# Altium PCB LS1-LS2.PcbDoc
Units mil, origin at the board's own origin, x right, y up, seen from the top; angles counter-clockwise.
Board outline 3550 x 3000 mil, 4 copper layers (Top Layer, Internal Plane 1, Internal Plane 2, Bottom Layer), stack 30.634 mil thick; 66 components, 57 nets, 305 pads, 88 vias.
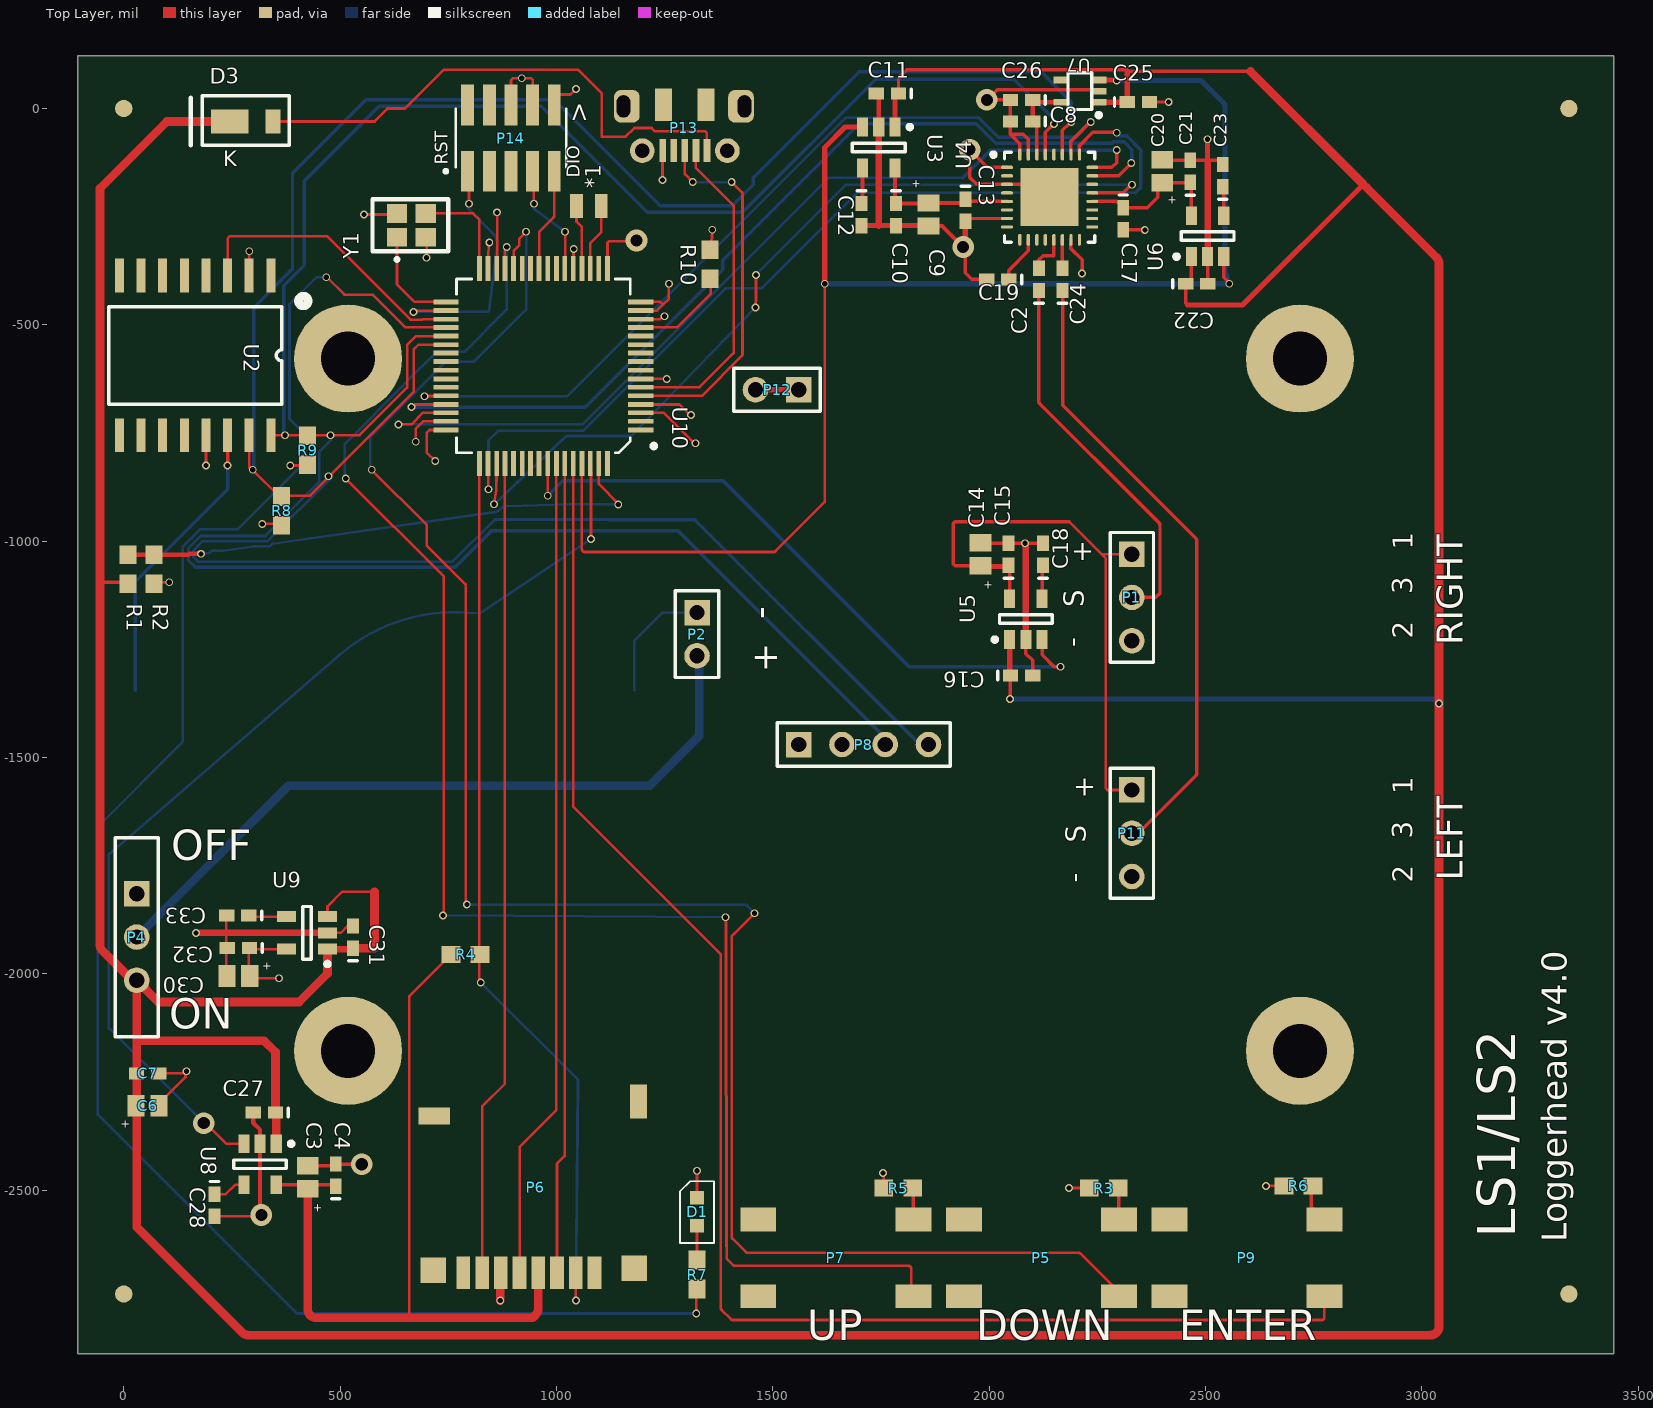
[diagram p0: Top Layer view]
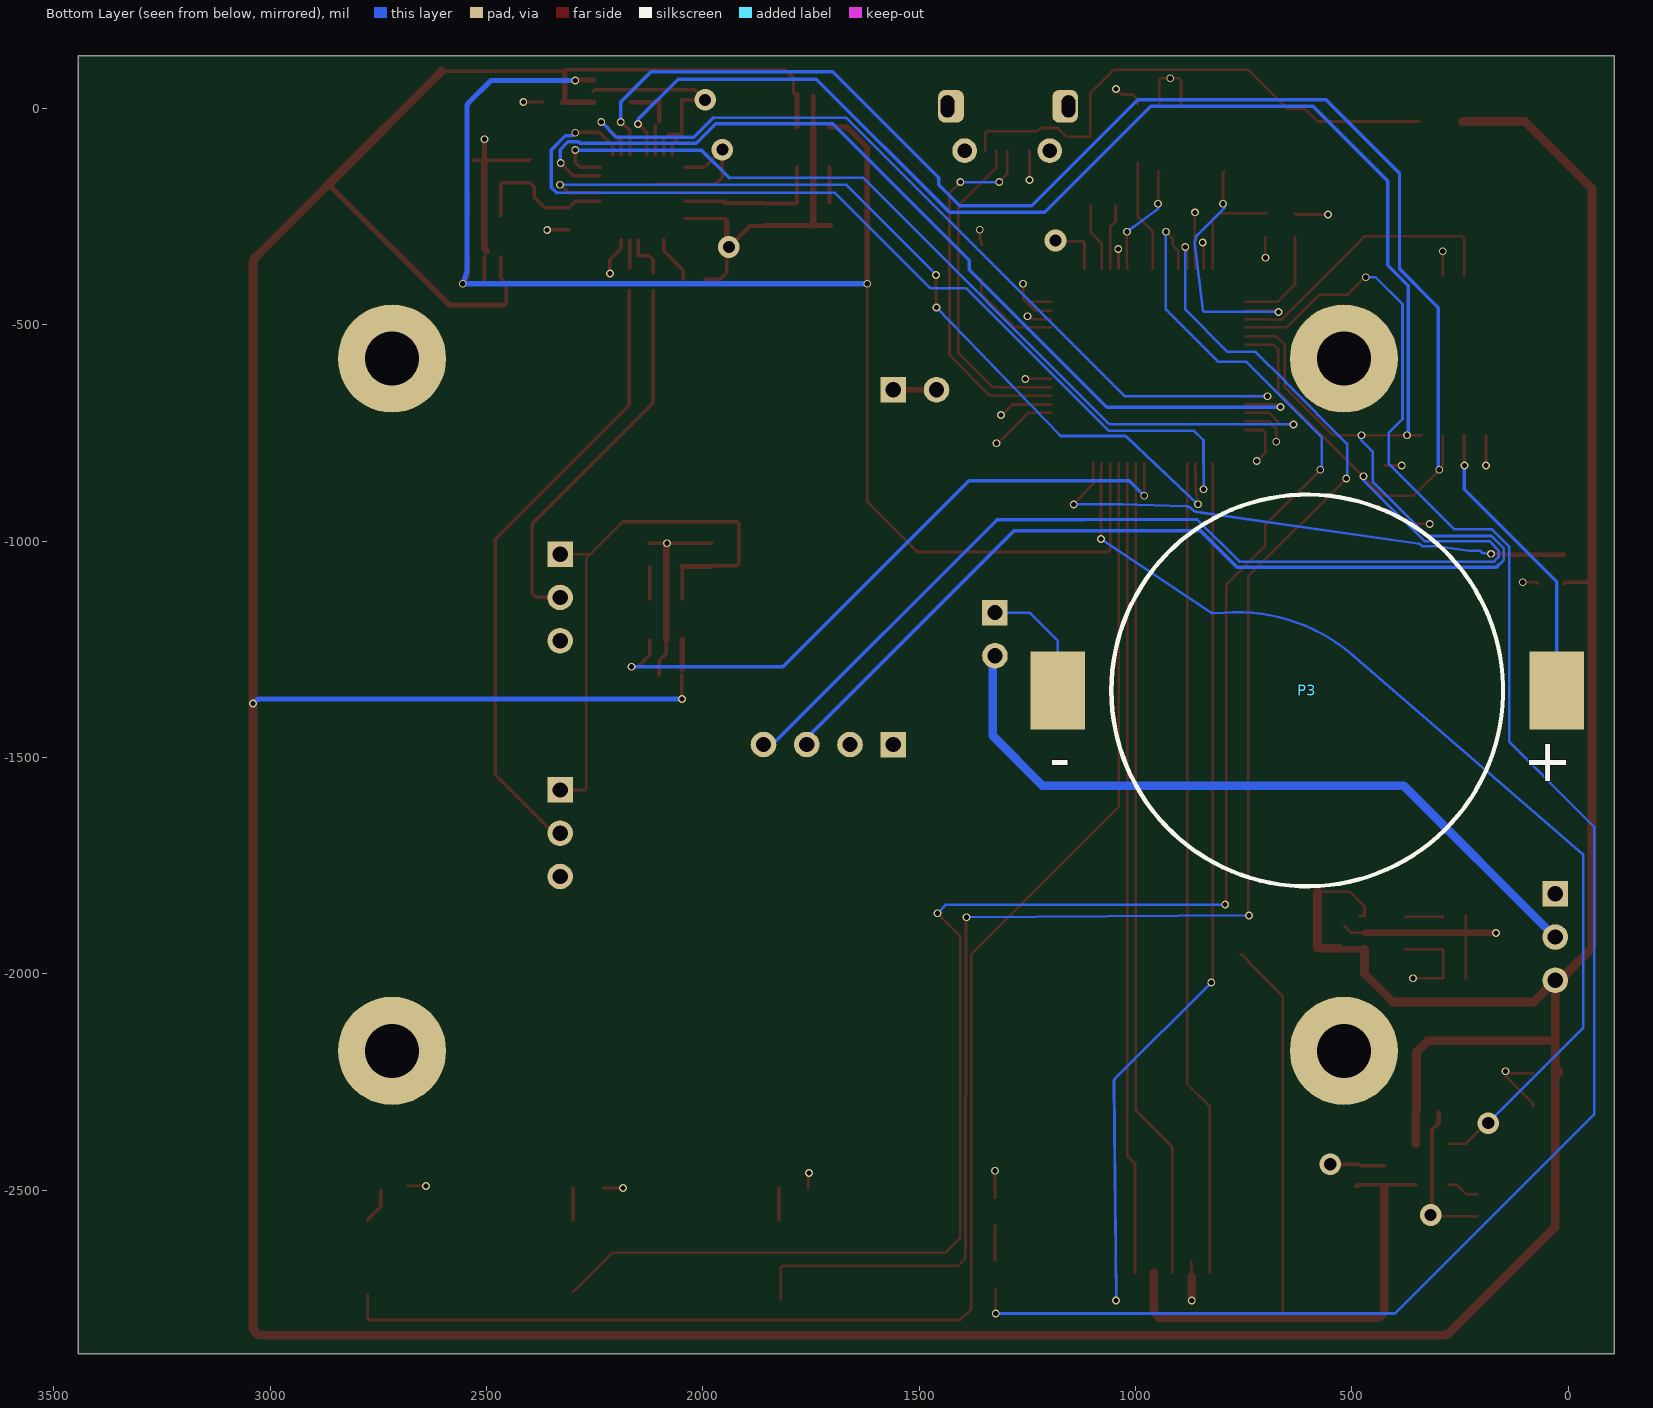
[diagram p1: Bottom Layer view, seen from below]
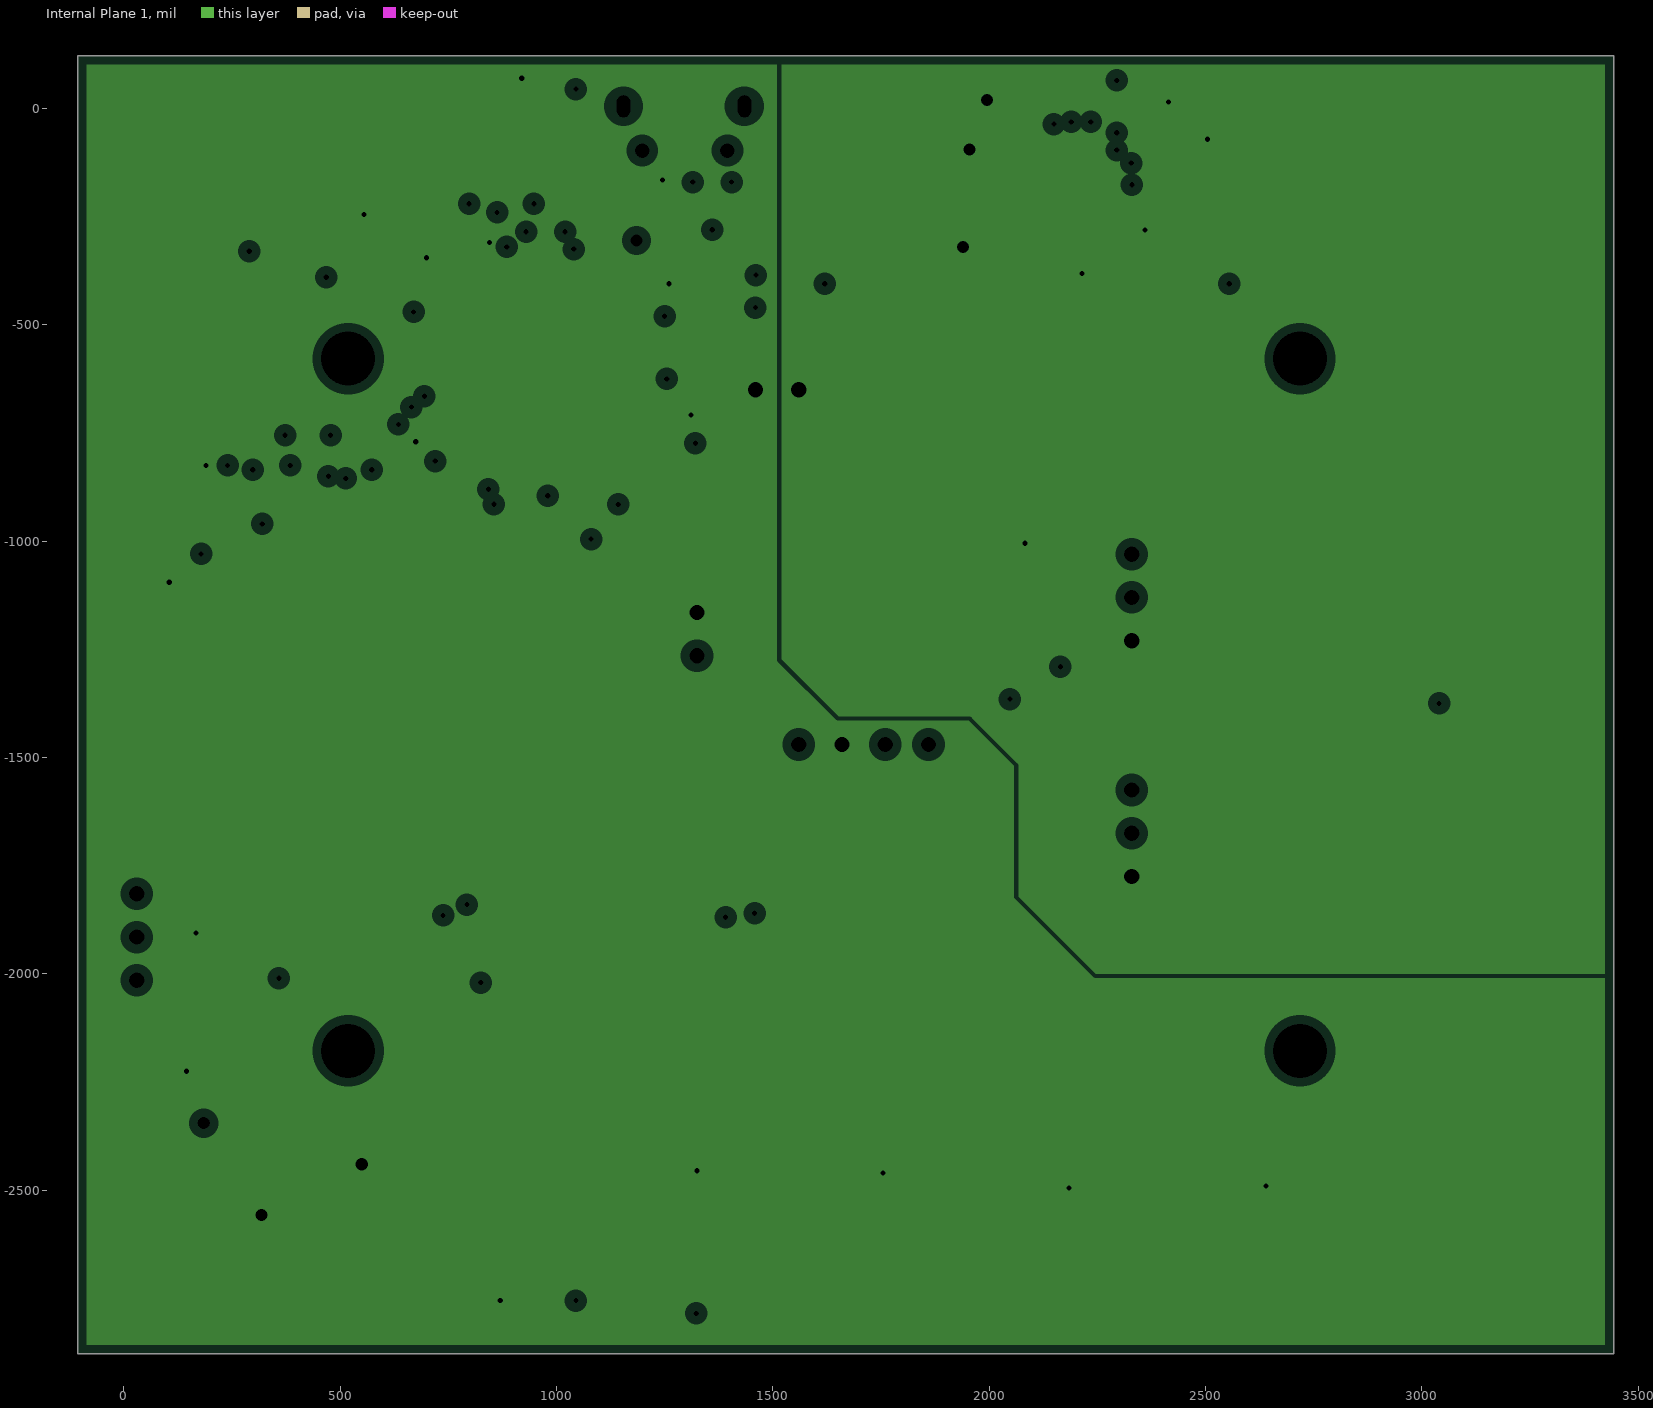
[diagram p2: Internal Plane 1, clearances drawn from the general rule]
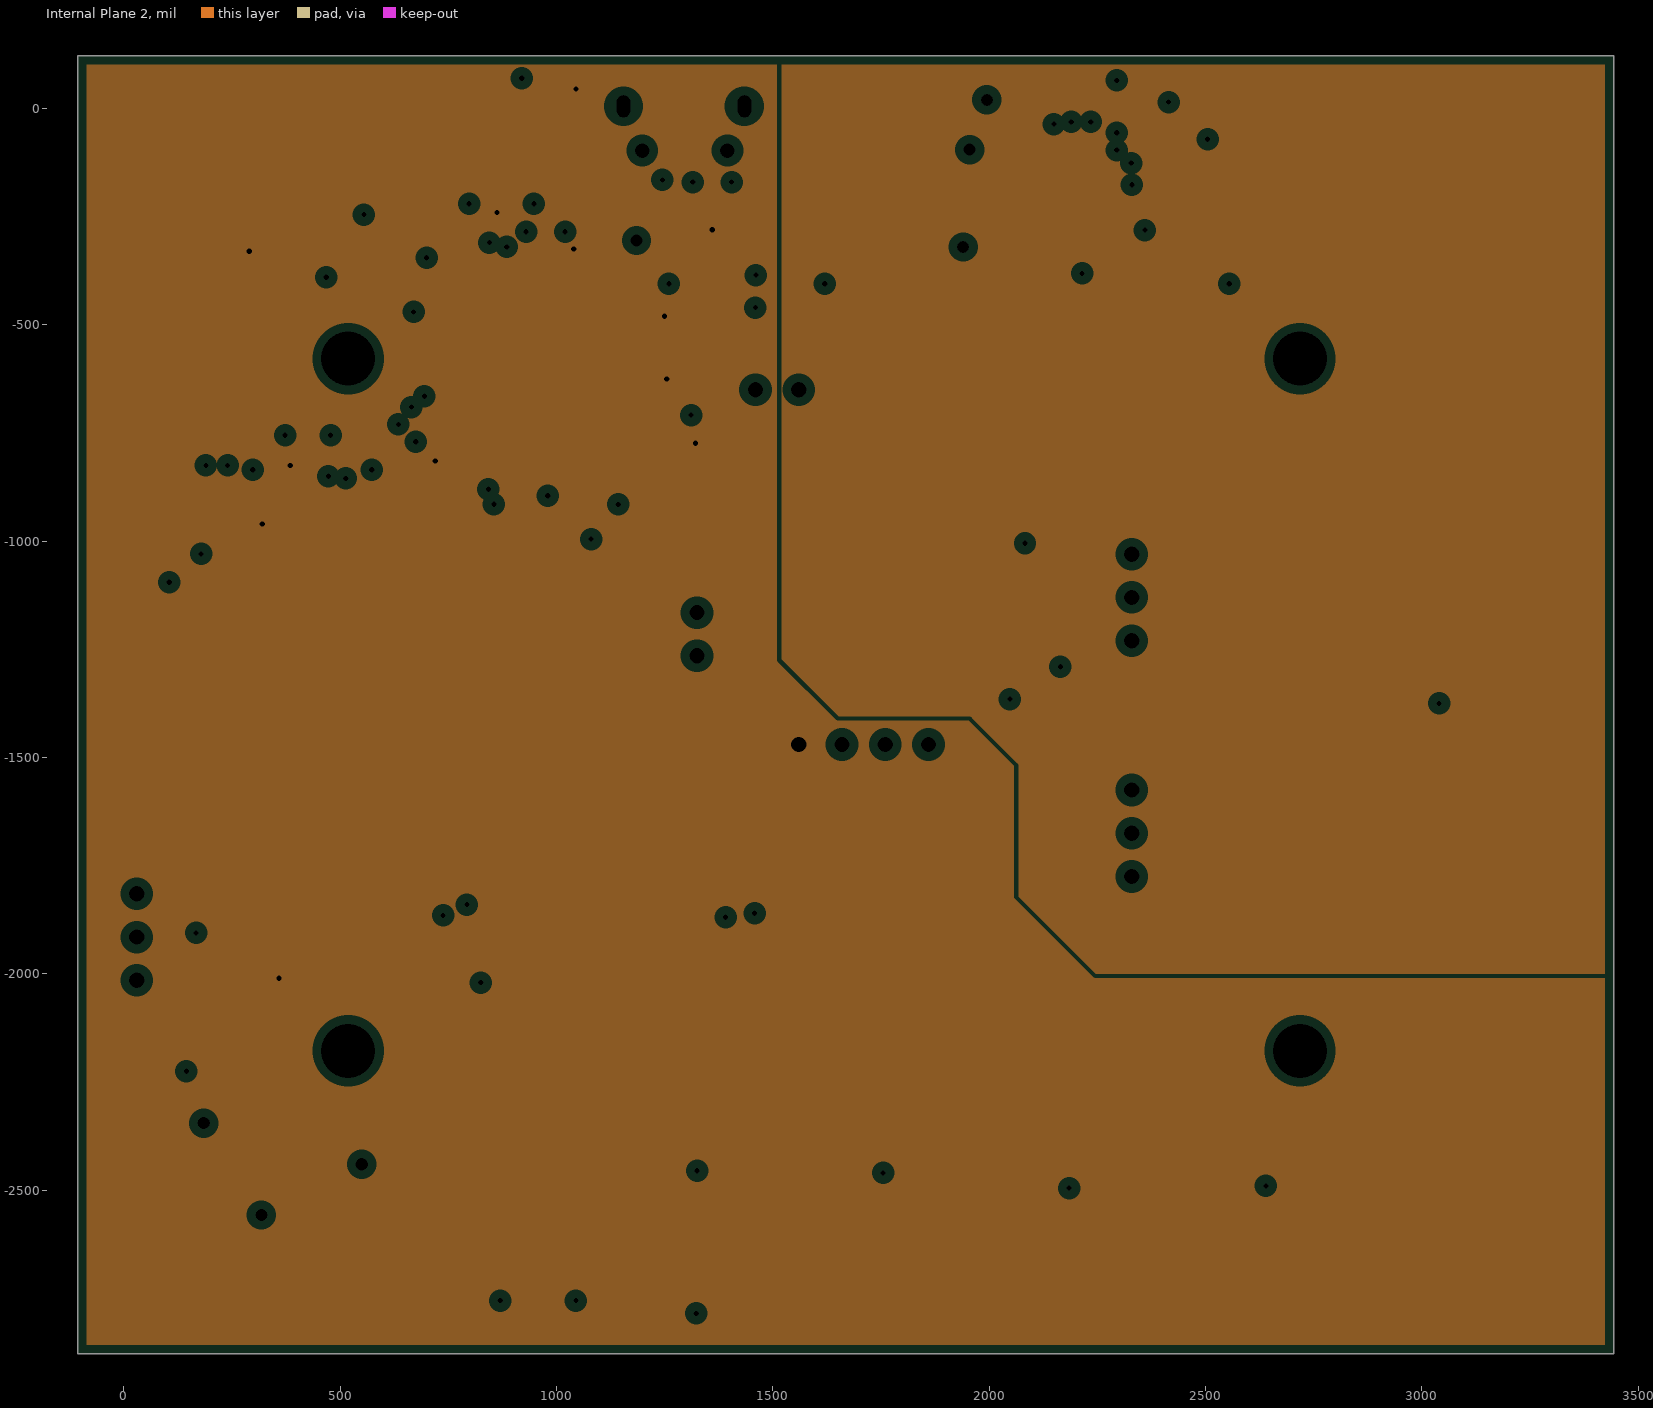
[diagram p3: Internal Plane 2, clearances drawn from the general rule]

## Layer stack, top to bottom
Top Solder: solder mask 0.4, Solder Resist, Dk 3.5
Top Layer: signal copper 1.4
Dielectric 1: core 10, FR-4, Dk 4.2
Internal Plane 1: plane copper 1.417, net (Multiple Nets)
Dielectric 3: prepreg 5, Dk 4.2
Internal Plane 2: plane copper 1.417, net VCC
Dielectric 2: core 10, Dk 4.2
Bottom Layer: signal copper 1.4
Bottom Solder: solder mask 0.4, Solder Resist, Dk 3.5

## Board outline
-106.42,-2877.95 -106.42,122.05 3443.58,122.05 3443.58,-2877.95

## Design rules (kind name [scope] priority, off if disabled: settings)
Clearance [All] p1: gap=6 ignorepadtopadclearanceinfootprint=FALSE except(0: Arc-Hole Track-Hole SMDPad-Hole THPad-Hole Via-Hole Fill-Hole Poly-Hole Region-Hole Text-Hole)
PlaneClearance [All] p1: clearance=20
PlaneConnect [All] p1: planeconnectstyle=Relief reliefexpansion=20 reliefentries=4 reliefconductorwidth=10 reliefairgap=10
PolygonConnect [All] p1: connectstyle=Relief reliefconductorwidth=10 reliefentries=4 polygonreliefangle="90 Angle" airgapwidth=10
RoutingVias [All] p1: holewidth=28 width=50 viastyle="Through Hole" minholewidth=10 minwidth=18 maxholewidth=28 maxwidth=50
SolderMaskExpansion [All] p1: expansion=4 istentingtop=FALSE
Width [All] p1: maxlimit=20 minlimit=6 preferedwidth=8
28 further rules are at their usual default settings.

## Classes and differential pairs
component class LS1-LS2: *1 C3 C4 C6 C7 C27 C28 C30 C31 C32 C33 D1 D3 P2 P3 P4 P5 P6 P7 P8 P9 P13 P14 R1 R2 R3 R4 R5 R6 R7 R8 R9 R10 U2 U8 U9 U10 Y1
component class LS1-LS2_audio: C2 C8 C9 C10 C11 C12 C13 C14 C15 C16 C17 C18 C19 C20 C21 C22 C23 C24 C25 C26 P1 P11 P12 U3 U4 U5 U6 U7

## Components (designator, comment, footprint, x,y, rotation, side; value= is the part's Value field where it differs from the comment)
*1 "XTAL_ABS06" XTAL-ABS06 1075,-225 r0 top
C2 "1uF" 0402 2115,-395 r90 top value=0.1uF
C3 "10uF" Tant0805 425,-2470 r270 top
C4 "2.2uF" 0402 490,-2465 r90 top value=0.1uF
C6 "10uF" Tant0805 55,-2305 r180 top
C7 "0.1uF" 0402 55,-2230 r0 top
C8 "0.1uF" 0402 2075,-30 r180 top
C9 "10uF" Tant0805 1860,-245 r90 top
C10 "0.1uF" 0402 1785,-245 r270 top
C11 "1uF" 0402 1765,35 r180 top value=0.1uF
C12 "0.01uF" 0402 1705,-245 r270 top value=0.1uF
C13 "0.1uF" 0402 1945,-235 r270 top
C14 "10uF" Tant0805 1980,-1030.16 r270 top
C15 "0.1uF" 0402 2045,-1030.16 r90 top
C16 "1uF" 0402 2075,-1310 r0 top value=0.1uF
C17 "0.1uF" 0402 2310,-255 r270 top
C18 "0.01uF" 0402 2125,-1030.16 r90 top value=0.1uF
C19 "0.1uF" 0402 2020,-395 r180 top
C20 "10uF" Tant0805 2400,-145 r270 top
C21 "0.1uF" 0402 2465,-145 r90 top
C22 "1uF" 0402 2480,-405 r0 top value=0.1uF
C23 "0.01uF" 0402 2540,-155 r90 top value=0.1uF
C24 "1uF" 0402 2170,-395 r90 top value=0.1uF
C25 "1uF" 0402 2345,15 r0 top value=0.1uF
C26 "1uF" 0402 2075,20 r180 top value=0.1uF
C27 "2.2uF" 0402 325,-2320 r180 top value=0.1uF
C28 "0.01uF" 0402 210,-2535 r270 top value=0.1uF
C30 "10uF" Tant0805 265,-2005 r0 top
C31 "2.2uF" 0402 530,-1915 r90 top value=0.1uF
C32 "2.2uF" 0402 265,-1940 r180 top value=0.1uF
C33 "0.01uF" 0402 263.62,-1865.34 r180 top value=0.1uF
D1 "LED_0603" Diode0603 1325,-2550 r90 top
D3 "Shottky" DFLS130 280,-30 r0 top
P1 "HYDROPHONE" HDR1X3 2330,-1030 r270 top
P2 "Header 2" HDR1X2 1325,-1165 r270 top
P3 "CoinCellHolder" CoinCellHolder 26.46,-1345 r0 bottom
P4 "switch EG1218" HDR1X3 30,-1815 r270 top
P5 "pushbutton" SOP4 2300,-2745 r180 top
P6 "microSD Hirose" "DM3D microSD" 1025,-2565 r90 top
P7 "pushbutton" SOP4 1825,-2745 r180 top
P8 "Display" HDR1X4 1560,-1470 r0 top
P9 "pushbutton" SOP4 2775,-2745 r180 top
P11 "HYDROPHONE" HDR1X3 2330,-1575 r270 top
P12 "GND Tie" HDR1X2 1560,-650 r180 top
P13 "microUSB" microUSB-B 1296.73,-46.18 r180 top
P14 "20021121-00010C4LF" AMPHENOL_20021121-00010C4LF 895,-68.23 r0 top
R1 "200k .01%" 3-0603 10,-1065 r270 top
R2 "68k 0.05%" 3-0603 70,-1065 r90 top
R3 "10k" 3-0603 2265,-2495 r180 top
R4 "10k" 3-0603 790,-1955 r0 top
R5 "10k" 3-0603 1790,-2495 r180 top
R6 "10k" 3-0603 2715,-2490 r180 top
R7 "330X" 3-0603 1325,-2695 r90 top
R8 "4.7k" 3-0603 365,-930 r270 top
R9 "4.7k" 3-0603 425,-790 r270 top
R10 "DNP" 3-0603 1355,-360 r90 top
U2 "DS3231" DS3231 340,-386.1 r270 top
U3 "LP3985IM5-3.3" MF05A_N 1745,-90 r270 top
U4 "SGTL5000" QFN32 2140,-205 r0 top
U5 "LP3985IM5-3.3" MF05A_N 2085,-1180.16 r90 top
U6 "LP3985IM5-3.3" MF05A_N 2505,-295 r90 top
U7 "TLV70018DCKR" TI-DCK5_V 2210,40 r180 top
U8 "ADP1712AUJZ-3.3-R7" MF05A_N 315,-2440 r270 top
U9 "ADP1712AUJZ-3.3-R7" MF05A_N 423.62,-1905.34 r180 top
U10 "MK20DX256VLH7" QFP50P1200X1200X160-64N 970,-595 r180 top
Y1 "FA-20H_16.0000MF10Z-AJ3" XTAL_FA-20H_16.0000MF10Z-AJ3 665,-270 r90 top

## Footprints (in the part's own frame and the unit in brackets; to place one, negate y for a bottom-side part, rotate by r counter-clockwise, add the part's x,y. Pads: shape width x height; smd on the part's side, far side on the other; paste and mask are expansions set on the pad)
3-0603 [mm] "Chip Resistor; Body 1.6 x 0.9 mm (LxW typ)"
  rect 1.1x1 smd: 1(-0.85,0) 2(0.85,0)
0402 [mm] "Chip Capacitor; Body 1.0 x 0.5 mm (LxW typ)"
  rect 0.9x0.7 smd: 1(-0.65,0) 2(0.65,0)
  silkscreen extent -1.4,-0.25 -1.4,0.25
AMPHENOL_20021121-00010C4LF [mm]
  rect 0.76x2.4 smd: 1(-2.54,-1.95) 2(-2.54,1.95) 3(-1.27,-1.95) 4(-1.27,1.95) 5(0,-1.95) 6(0,1.95) 7(1.27,-1.95) 8(1.27,1.95) 9(2.54,-1.95) 10(2.54,1.95)
  silkscreen extent -3.92,-2.05 3.24,1.72, body extent -3.17,-2.75 3.17,2.75, height 4.55
CoinCellHolder [mm] "MPD BU2032SM-BT-GTR"
  rect 3.2x4.572 smd: 1(0,0) 2(29.3,0)
  silkscreen extent 3.15,-11.5 26.15,11.5
DFLS130 [mm] "Diode"
  rect 0.9x1.4 smd: A(1.65,0)
  rect 2.2x1.4 smd: K(-0.9,0)
  silkscreen extent -2.5,-1.4 2.6,1.5
Diode0603 [mm]
  rect 0.8x0.8 smd: A(-0.825,0) K(0.825,0)
  silkscreen extent -1.83,-1 1.8,1
"DM3D microSD" [mm] "MICROSD_HIROSE Push-Pull"
  rect 1.5x1.5 smd: 0(-3.048,7.874) 0(-2.921,-3.937)
  rect 1x1.85 smd: 0(6,7.8)
  rect 2x1 smd: 0(6.85,-4.191)
  rect 1.9x0.8 smd: 1(-3.188,-1.601) 2(-3.188,-0.501) 3(-3.188,0.599) 4(-3.188,1.699) 5(-3.188,2.799) 6(-3.188,3.899) 7(-3.188,4.999) 8(-3.188,6.099)
  body extent -3.65,-4.45 7.8,7.5, height 1.55
DS3231 [mm]
  rect 1.98x0.53 smd: 1(0,0) 2(0,-1.27) 3(0,-2.54) 4(0,-3.81) 5(0,-5.08) 6(0,-6.35) 7(0,-7.62) 8(0,-8.89) 9(9.37,-8.89) 10(9.37,-7.62) 11(9.37,-6.35) 12(9.37,-5.08) 13(9.37,-3.81) 14(9.37,-2.54) 15(9.37,-1.27) 16(9.37,0)
  silkscreen extent 1.83,-9.53 7.54,0.64
HDR1X2 [mm] "Connector; Header; 2 Position"
  rect 1.5x1.5 hole 0.9: 1(0,0)
  round 1.5 hole 0.9: 2(2.54,0)
  silkscreen extent -1.27,-1.27 3.81,1.27
HDR1X3 [mm] "Connector; Header; 3 Position"
  rect 1.5x1.5 hole 0.9: 1(0,0)
  round 1.5 hole 0.9: 2(2.54,0) 3(5.08,0)
  silkscreen extent -1.27,-1.27 6.35,1.27
HDR1X4 [mm] "Connector; Header; 4 Position"
  rect 1.5x1.5 hole 0.9: 1(0,0)
  round 1.5 hole 0.9: 2(2.54,0) 3(5.08,0) 4(7.62,0)
  silkscreen extent -1.27,-1.27 8.89,1.27
MF05A_N [mm] "SOT23, 5-Leads, Body 2.9x1.6mm, Pitch 0.95mm, Lead Span 2.8mm, IPC Medium Density"
  rect 1.1x0.65 smd: 1(-1.2,0.95) 2(-1.2,0) 3(-1.2,-0.95) 4(1.2,-0.95) 5(1.2,0.95)
  silkscreen extent -1.32,-1.55 0.25,1.95, body extent -0.9,-1.55 0.9,1.55, height 1.19
microUSB-B [mm]
  rect 0.4x1.35 smd: 1(-1.3,1.3) 2(-0.65,1.3) 3(0,1.3) 4(0.65,1.3) 5(1.3,1.3)
  rrect50% 1.5x1.9 hole 0.8 slot 1.3 at 90 deg copper offset 0.2,0: ""(-3.5,-1.3)
  round 1.45 hole 0.85: ""(-2.5,1.3) ""(2.5,1.3)
  rect 1x1.9 smd: ""(-1.25,-1.4) ""(1.25,-1.4)
  rrect50% 1.5x1.9 hole 0.8 slot 1.3 at 90 deg copper offset -0.2,0: ""(3.6,-1.3)
  body extent -4.1,-4.07 4.1,1.36, height 2.68
QFN32 [mm]
  oval 0.7x0.2 smd: 1(-2.5,1.75) 2(-2.5,1.25) 3(-2.5,0.75) 4(-2.5,0.25) 5(-2.5,-0.25) 6(-2.5,-0.75) 7(-2.5,-1.25) 8(-2.5,-1.75) 17(2.5,-1.75) 18(2.5,-1.25) 19(2.5,-0.75) 20(2.5,-0.25) 21(2.5,0.25) 22(2.5,0.75) 23(2.5,1.25) 24(2.5,1.75)
  oval 0.2x0.7 smd: 9(-1.75,-2.5) 10(-1.25,-2.5) 11(-0.75,-2.5) 12(-0.25,-2.5) 13(0.25,-2.5) 14(0.75,-2.5) 15(1.25,-2.5) 16(1.75,-2.5) 25(1.75,2.5) 26(1.25,2.5) 27(0.75,2.5) 28(0.25,2.5) 29(-0.25,2.5) 30(-0.75,2.5) 31(-1.25,2.5) 32(-1.75,2.5)
  rect 3.4x3.4 smd paste-1.2: 33(0,0)
  silkscreen extent -3.42,-2.65 2.65,2.65, body extent -2.5,-2.5 2.5,2.5, height 1
QFP50P1200X1200X160-64N [mil]
  rect 58x11 smd: 1(-225,148) 2(-225,128) 3(-225,108) 4(-225,89) 5(-225,69) 6(-225,49) 7(-225,30) 8(-225,10) 9(-225,-10) 10(-225,-30) 11(-225,-49) 12(-225,-69) 13(-225,-89) 14(-225,-108) 15(-225,-128) 16(-225,-148) 33(225,-148) 34(225,-128) 35(225,-108) 36(225,-89) 37(225,-69) 38(225,-49) 39(225,-30) 40(225,-10) 41(225,10) 42(225,30) 43(225,49) 44(225,69) 45(225,89) 46(225,108) 47(225,128) 48(225,148)
  rect 11x58 smd: 17(-148,-225) 18(-128,-225) 19(-108,-225) 20(-89,-225) 21(-69,-225) 22(-49,-225) 23(-30,-225) 24(-10,-225) 25(10,-225) 26(30,-225) 27(49,-225) 28(69,-225) 29(89,-225) 30(108,-225) 31(128,-225) 32(148,-225) 49(148,225) 50(128,225) 51(108,225) 52(89,225) 53(69,225) 54(49,225) 55(30,225) 56(10,225) 57(-10,225) 58(-30,225) 59(-49,225) 60(-69,225) 61(-89,225) 62(-108,225) 63(-128,225) 64(-148,225)
  silkscreen extent -201,-201 201,201
SOP4 [mm]
  rect 2.1x1.4 smd: 1(0,0) 2(0,-4.5) 3(9.1,-4.5) 4(9.1,0)
Tant0805 [mil]
  rect 40x50 smd: 1(-26.5,0) 2(26.5,0)
TI-DCK5_V [mm] "SOT23, 5-Leads, Body 2x1.25mm, Pitch 0.65mm"
  rect 0.9x0.4 smd: 1(-1.1,0.65) 2(-1.1,0) 3(-1.1,-0.65) 4(1.1,-0.65) 5(1.1,0.65)
  silkscreen extent -1.23,-1.07 0.7,1.52, body extent -0.63,-1 0.63,1, height 1.1
XTAL-ABS06 [mm]
  rect 0.75x1.4 smd: 1(-0.725,0) 2(0.725,0)
XTAL_FA-20H_16.0000MF10Z-AJ3 [mm]
  rect 1.1x1.2 smd mask+0.1: 1(-0.7,0.85) 2(-0.7,-0.85) 3(0.7,-0.85) 4(0.7,0.85)
  silkscreen extent -2.1,0.75 -1.9,0.95, body extent -1,-1.25 1,1.25, height 0.55

## Part data
*1: Supplier Part Number 1=535-10248-2-ND, Supplier 1=Digi-Key
C2 C4 C7 C8 C10 C11 C12 C13 C15 C16 C17 C18 C19 C21 C22 C23 C24 C25 C26 C27 C28 C31 C32 C33: library part C0402, "Ceramic Chip Capacitor - Standard", PackageDocument=Mar-2001, Code_IPC="1005 [0402]", Code_JEITA=0402, ComponentLink1Description="Manufacturer Link", ComponentLink1URL=http://www.kemet.com/, ComponentLink2Description=Datasheet, ComponentLink2URL=http://www.kemet.com/kemet/web/homepage/kechome.nsf/vapubfilesname/F3102TA.pdf/$file/F3102TA.pdf, DatasheetDocument=Mar-2001, LatestRevisionDate=19-Mar-2004, LatestRevisionNote="Silkscreen size reduced.", Note="Footprint corresponds to dimensions for bulk cassette packaging. This case size has tightened tolerances.", PackageReference=0402, Published=17-Jul-2002, Publisher="Altium Limited"
C3 C6 C9 C14 C20 C30: library part Tant0805
D3: library part DFLS130, Supplier Part Number 1=DFLS130LDITR-ND, Supplier 1=Digi-Key
P1 P4 P11: library part "Header 3", "Header, 3-Pin", LatestRevisionDate=17-Jul-2002, LatestRevisionNote="Re-released for DXP Platform.", Publisher="Altium Limited"
P2: "Header, 2-Pin", LatestRevisionDate=17-Jul-2002, LatestRevisionNote="Re-released for DXP Platform.", Publisher="Altium Limited"
P3: Supplier Part Number 1=BU2032SM-BT-GCT-ND, Supplier 1=Digi-Key
P5 P7 P9: Supplier Part Number 1=450-1757-2-ND, Supplier 1=Digi-Key
P6: Supplier Part Number 1=HR1941DKR-ND, Supplier 1=Digi-Key
P8: library part "Header 4", "Header, 4-Pin", LatestRevisionDate=17-Jul-2002, LatestRevisionNote="Re-released for DXP Platform.", Publisher="Altium Limited"
P12: library part "Header 2", "Header, 2-Pin", LatestRevisionDate=17-Jul-2002, LatestRevisionNote="Re-released for DXP Platform.", Publisher="Altium Limited"
P13: library part microUSB-B, Supplier Part Number 1=WM1399TR-ND, Supplier 1=Digi-Key
P14: "Conn Rect BrdtoBrd UnshroudedHeader 10Cnts SMT 1.27x1.27mmSpng", Package=None, Check_prices=https://www.snapeda.com/parts/20021121-00010C4LF/Amphenol+FCI/view-part/?ref=eda, MF="Amphenol ICC", MP=20021121-00010C4LF, SnapEDA_Link=https://www.snapeda.com/parts/20021121-00010C4LF/Amphenol+FCI/view-part/?ref=snap
R1 R2 R3 R4 R5 R6 R7 R8 R9 R10: library part ERJ3RK, "Precision Thick Film Chip Resistor, 10 Ohm to 1M Ohm Range, 1% and 0.5% Tolerance, 0603 Size, 0.063 W", PackageDocument=Mar-2003, Code_IPC="1608 [0603]", ComponentLink1Description="Manufacturer Link", ComponentLink1URL=http://www.panasonic.com/industrial/components/resistive_products.htm, ComponentLink2Description=Datasheet, ComponentLink2URL=http://www.panasonic.com/industrial/components/pdf/AOA0000CE2.pdf, LatestRevisionDate=19-Mar-2004, LatestRevisionNote="Silkscreen size reduced.", PackageReference=3-0603, Published=17-Dec-2003, Publisher="Altium Limited"
U2: Supplier Part Number 1=DS3231S#-ND, Supplier 1=Digi-Key
U3 U5 U6: "Micropower, 150mA Low-Noise Ultra Low-Dropout CMOS Voltage Regulator", DigiKeyPartNumber=LP3985IM5-3.3CT-ND, Manufacturer="National Semiconductor", PackageTopMarking=LDQB*XTT, PowerWise=N, ComponentLink1Description="LP3985 Datasheet", ComponentLink1URL=http://www.national.com/ds/LP/LP3985.pdf, ComponentLink2Description="LP3985 Web Page", ComponentLink2URL=http://www.national.com/pf/LP/LP3985.html, ComponentLink3Description="MF05A Package Page", ComponentLink3URL=http://www.national.com/packaging/folders/mf05a.html, CompType="LDO IC", DatasheetVersion=Aug-2005, PackageDescription="Molded SOT-23, .115 x .063 x .040 in Body, 5 Lead, .0375 in Pitch", PackageReference=MF05A, PackageVersion="revD, Aug-2008", PartNumber=LP3985IM5-3.3, PinCount=5, Published=4-Dec-2008, Publisher="Altium Limited", RoHS=O
U7: "Single Output LDO, 200 mA, Fixed 1.8 V Output, 2 to 5.5 V Input, with Low IQ, 5-pin SC70 (DCK), -40 to 125 degC, Green (RoHS & no Sb/Br)", Manufacturer="Texas Instruments", Supplier Part Number 1=296-32409-2-ND, Accuracy(%)=2, Code_JEDEC=MO-203, ComponentLink1Description="Manufacturer URL", ComponentLink1URL=http://www.ti.com/, ComponentLink2Description=Datasheet, ComponentLink2URL=http://www.ti.com/general/docs/lit/getliterature.tsp?genericPartNumber=TLV70018&fileType=pdf, ComponentLink3Description="Package Specification", ComponentLink3URL=http://www.ti.com/litv/pdf/mpds025f, DatasheetVersion=SLVSA00D, Eco-Plan="Green (RoHS & no Sb/Br)", Fixed Output Options(V)=1.8, Iout(Max)(A)=0.2, Iq(Typ)(mA)=0.03, Mounting Technology="Surface Mount", PackageDescription="5-Pin Plastic Small-Outline, Body 2 x 1.25 mm, Pitch 0.65 mm", PackageReference=DCK5, PackageVersion=4093553-3/G, PartNumber=TLV70018DCKR, SubFamily="Single Channel LDO", Supplier 1=Digi-Key, Supplier 2=Digi-Key, Supplier 3=Digi-Key, Supplier 4=Newark, Supplier 5=Mouser, Supplier Part Number 2=296-32409-1-ND, Supplier Part Number 3=296-32409-6-ND, Supplier Part Number 4=55R7461, Supplier Part Number 5=595-TLV70018DCKR, Vdo(Typ)(mV)=175, Vin(Max)(V)=5.5, Vin(Min)(V)=2, Vout Adj(Max)(V)=1.8, Vout Adj(Min)(V)=1.8
U8 U9: library part LP3985IM5-3.3, "Micropower, 150mA Low-Noise Ultra Low-Dropout CMOS Voltage Regulator", DigiKeyPartNumber=LP3985IM5-3.3CT-ND, Manufacturer="National Semiconductor", PackageTopMarking=LDQB*XTT, PowerWise=N, ComponentLink1Description="LP3985 Datasheet", ComponentLink1URL=http://www.national.com/ds/LP/LP3985.pdf, ComponentLink2Description="LP3985 Web Page", ComponentLink2URL=http://www.national.com/pf/LP/LP3985.html, ComponentLink3Description="MF05A Package Page", ComponentLink3URL=http://www.national.com/packaging/folders/mf05a.html, CompType="LDO IC", DatasheetVersion=Aug-2005, PackageDescription="Molded SOT-23, .115 x .063 x .040 in Body, 5 Lead, .0375 in Pitch", PackageReference=MF05A, PackageVersion="revD, Aug-2008", PartNumber=LP3985IM5-3.3, PinCount=5, Published=4-Dec-2008, Publisher="Altium Limited", RoHS=O
U10: "ARMÂ®CortexÂ®-M4Kinetis K20å¾®æŽ§åˆ¶å™¨IC 32ä½72MHz 256KBï¼ˆ256K x 8ï¼‰FLASH 64-LQFPï¼ˆ10x10ï¼‰", Package="LQFP-64 NXP Semiconductors", Availability=Unavailable, MF="NXP USA", MP=MK20DX256VLH7, Price=None, SnapEDA_Link=https://www.snapeda.com/parts/MK20DX256VLH7/NXP%20USA%20Inc./view-part/625714/?ref=snap
Y1: "16 MHz ±10ppm Crystal 8pF 80 Ohms 4-SMD, No Lead", Package="NON STANDARD-4 EPSON", Check_prices=https://www.snapeda.com/parts/FA-20H%2016.0000MF10Z-AJ3/EPSON/view-part/?ref=eda, MF=EPSON, MP="FA-20H 16.0000MF10Z-AJ3", SnapEDA_Link=https://www.snapeda.com/parts/FA-20H%2016.0000MF10Z-AJ3/EPSON/view-part/?ref=snap

## Free pads (board coordinates)
  round 40 smd paste-20 mask+5: 0(0,-2740) 0(0,0) 0(3340,-2740) 0(3340,0)
  round 250 hole 125: 0(518.58,-2177.95) 0(518.58,-577.95) 0(2718.58,-2177.95) 0(2718.58,-577.95)

## Via types
v1: diameter 18, hole 12, Top Layer to Bottom Layer, tented both sides, 81 vias
v2: diameter 50, hole 28, Top Layer to Bottom Layer, tented both sides, 6 vias
v3: diameter 50, hole 28, Top Layer to Bottom Layer, 1 vias

## Nets (pads, with @x,y where several pads share a name; then routed paths per layer and width w, separated by ;. In a path a pad name is that pad's centre, name@x,y a point inside that pad or via, vN(x,y) a via of type N, cw(c..) or ccw(c..) an arc to the next point about the centre after c; other vN are vias at no path point)
AGND: C8.2 C9.1 C10.2 C11.2 C12.2 C13.2 C14.1 C15.2 C16.2 C17.2 C18.2 C19.2 C20.1 C21.2 C22.2 C23.2 C25.2 C26.2 P1.3 P11.3 P12.1 U3.2 U4.1 U4.3 U4.7 U4.15 U4.31 U4.32 U4.33 U5.2 U6.2 U7.2 | length 2799.1
  Top Layer w8: v2(1940,-320) 1945,-315 1945,-380 1960,-395 C19.2 ; C13.2@1950,-254.21 U4.7 ; C14.1 1980.91,-1004.57 C15.2 v1@2079.57,-1004.57 ; U4.1 1996.1,-136.1 v2(1955,-95) 1955,-159.41 1971.06,-175.47 U4.3 U4.33@2110.47,-175.47 ; U4.32 2071.1,-81.1 2049.41,-59.41 ; U5.2 2085,-1260 2100.59,-1275.59 C16.2 ; v1@2085,-1010 v1@2079.57,-1004.57 ; U4.31 2090.79,-70.79 2079.41,-59.41 2049.41,-59.41 ; C18.2 v1@2079.57,-1004.57 ; U4.15 2189.21,-324.21 2215,-350 v1@2215,-385 ; U7.2 2249.53,43.78 2018.78,43.78 v2(1995,20) C26.2 C8.2 2049.41,-59.41 ; C17.2 v1@2359.41,-280.59 ; C25.2 v1(2415,15) ; C20.1 2400.91,-119.41 C21.2 2505,-119.41 C23.2@2530,-119.41 ; C22.2@2505,-404.41 U6.2
  Top Layer w10: U3.2 C11.2@1745,29.41 ; C9.1 1891.5,-271.5 v2(1940,-320)
  Top Layer w12: C12.2 1745,-270.59 C10.2 C9.1@1859.09,-270.59 ; v2@1945,-315 C13.2 ; 2505,-119.41 v1@2505,-70
  Top Layer w15: 1745,-270.59 U3.2 ; U5.2 v1@2085,-1010 ; U6.2@2500,-330 2500.61,-329.39 ccw(c2490,-318.79) 2505,-318.79 2505,-119.41
  other v1: 2083,-1005 2215,-381 2360,-281 2505,-71
BATT_BACK: P3.1 U2.14 | length 678.5
  Top Layer w8: v1(240,-825) U2.14
  Bottom Layer w8: P3.1 26.46,-1093.54 240,-880 v1(240,-825)
BCLK: U4.24 U10.46 | length 2130
  Top Layer w6: v1(635,-730) 665.12,-730 692.12,-703 U10.46
  Top Layer w8: U4.24 2283.9,-136.1 2295,-125 v1@2295,-100
  Bottom Layer w6: v1(635,-730) 1060,-730 1630,-160 1939.5,-160
  Bottom Layer w8: 1939.5,-160 2003.5,-96 v1(2295,-96)
CS1: P6.2 R4.2 U10.49 | length 2118.7
  Top Layer w6: U10.49 822,-2017 v1(825,-2020) ; v1(1045,-2755) 1045,-2699.91 P6.2@1045.98,-2665.53
  Bottom Layer w6: v1(825,-2020) 1048.24,-2243.24 ; v1(1045,-2755) 1049.97,-2247.51 ccw(c1043.97,-2247.45) 1048.29,-2243.29
D+: P13.3 U10.5 | length 854
  Top Layer w6: U10.5 1336,-664 1428.24,-571.76 ccw(c1424,-567.51) 1430,-567.51 1430,-197.49 ccw(c1424,-197.49) 1428.24,-193.24 v1(1405,-170) ; P13.3 1296.73,-151.73 v1(1315,-170)
  Bottom Layer w6: v1(1315,-170) v1(1405,-170)
D-: P13.2 U10.6 | length 751.2
  Top Layer w6: U10.6 1331,-644 1408.24,-566.76 ccw(c1404,-562.51) 1410,-562.51 1410,-227.49 ccw(c1404,-227.49) 1408.24,-223.24 1322.32,-137.32 P13.2
DGND: C3.1 C4.2 C6.1 C7.2 C27.2 C28.2 C30.1 C31.2 C32.2 C33.2 D1.K P2.1 P3.2 P6.6 P8.2 P12.2 P13.5 P14.6 P14.8 R2.1 R3.2 R5.2 R6.2 U2.13 U8.2 U9.2 U10.4 U10.15 U10.16 U10.31 U10.47 Y1.2 Y1.4 | length 2651.8
  Top Layer w6: R2.1 73.46,-1095 v1(105,-1095) ; C7.2 136.75,-2230 141.75,-2225 v1(145,-2225) 142.7,-2227.3 142.7,-2238.8 81.5,-2300 C6.1 ; v1(190,-825) U2.13 ; C28.2 v2@314.41,-2560.59 ; C30.1@237.12,-2010.34 237.12,-1905.34 237.12,-1866.25 C33.2 ; U9.2 501.54,-1905.34 C31.2@517.13,-1889.75 ; v1(555,-245) 626.49,-245 ccw(c626.49,-239) 630.73,-243.25 Y1.4 ; v1(675,-770) 675,-740 692,-723 U10.47 ; Y1.2 700,-299.09 v1(700,-345) ; U10.31 842,-335.03 cw(c848,-335.03) 842.04,-334.31 v1(845,-309.77) ; P6.6@870,-2699.91 P6.6@871.74,-2665.26 ; P14.6 895,65 900,70 v1(920,70) 941.49,70 945,66.49 P14.8 ; U10.4 1284,-684 v1@1310,-710 ; U10.15 1233,-467 1246.5,-453.5 ; U10.16 1240,-447 1246.5,-453.5 ; v1(1245,-165) 1245.28,-164.72 1245.28,-97.64 P13.5 ; v1(1260,-405) 1260,-440 1246.5,-453.5 ; D1.K v1(1325,-2455) ; R5.2 1756.54,-2456.54 v1@1760,-2460 ; v1(2185,-2495) R3.2 ; v1(2640,-2490) R6.2
  Top Layer w8: C3.1 480.91,-2443.5 485,-2439.41 485.59,-2440 v2(550,-2440)
  Top Layer w10: C27.2 299.41,-2344.41 315,-2360 U8.2 315,-2535 v2@320.61,-2540.61 ; v2(318.08,-2557.42) 320.79,-2554.57 ccw(c313.54,-2547.68) v2@320.63,-2540.63
  Top Layer w15: v1(167,-1905.34) 237.12,-1905.34 U9.2
  Top Layer w20: v1(870,-2755) P6.6@870,-2699.91
  Bottom Layer w6: P3.2 1180,-1230 1245,-1165 P2.1
  other v1: 1755,-2460 1311.3,-708.7
DN-TX: P5.1 U10.28 | length 4320.3
  Top Layer w6: v1(573,-835) 700,-962 700,-1010 790,-1100 v1@790,-1840 ; U10.28 901,-329 914.35,-315.65 914.35,-300.65 v1(930,-285) ; v1(1458,-1860) 1406.76,-1911.24 ccw(c1411,-1915.49) 1405,-1915.49 1405,-2607.51 ccw(c1411,-2607.51) 1406.74,-2611.74 1438.22,-2643.22 ccw(c1442.49,-2639) 1442.45,-2645 2207.51,-2645 cw(c2207.51,-2651) 2211.76,-2646.76 P5.1@2300,-2735
  Bottom Layer w6: v1@570,-835 570,-759.54 744.54,-585 810,-585 930,-465 v1(930,-285) ; v1(793,-1840) 1438,-1840 v1(1458,-1860)
ENT-RST: P9.1 U10.60 | length 3557.2
  Top Layer w6: U10.60 1039,-1614 1380,-1955 1380,-2772.51 ccw(c1386,-2772.51) 1381.74,-2776.74 1403.27,-2798.27 ccw(c1407.49,-2794) 1407.45,-2800 2769,-2800 ccw(c2769,-2794) 2775,-2794 P9.1@2775,-2741.35
HYDRO_EN: U5.3 U10.57 | length 1541.6
  Top Layer w6: v1(980,-895) U10.57
  Top Layer w8: U5.3 2122.4,-1262.4 2150,-1290 v1(2165,-1290)
  Bottom Layer w8: v1(980,-895) 1015,-860 1385,-860 1815,-1290 v1(2165,-1290)
I2SDIN: U4.26 U10.44 | length 1985.8
  Top Layer w6: v1(695,-665) 695.5,-664.5 744.5,-664.5 U10.44
  Top Layer w8: U4.26 2189.21,-75.79 v1@2235,-30
  Bottom Layer w6: v1(695,-665) 1025.46,-665 1669.46,-21 1976,-21
  Bottom Layer w8: 1976,-21 2021,-66 2200,-66 v1(2235,-31)
I2SDOUT: U4.25 U10.50 | length 2199.5
  Top Layer w6: U10.50 842.8,-846 v1(842.8,-880)
  Top Layer w8: U4.25 2208.9,-86.1 2240,-55 v1@2295,-55
  Bottom Layer w6: v1(842.8,-880) 843,-769.47 cw(c849,-769.49) 844.76,-765.24 865,-745 1061.97,-745 1391.97,-415 1472.51,-415 ccw(c1472.51,-409) 1476.74,-413.26 1693.26,-196.74 cw(c1697.49,-201) 1697.49,-195 2337.87,-195
  Bottom Layer w8: v1(2295,-56) 2302,-63 2317.8,-63 2350,-95.2 2350,-182.87 2337.87,-195
IN_L: C24.2 U4.14 | length 65.5
  Top Layer w8: C24.2@2169.53,-368.94 U4.14
IN_R: C2.2 U4.13 | length 105.5
  Top Layer w8: C2.2@2115,-380 2115,-350 2125.16,-339.84 2149.84,-339.84 U4.13
INT: U2.3 U10.35 | length 673.5
  Top Layer w6: U2.3 240,-300 245,-295 469.54,-295 662.54,-488 690.27,-488 691.27,-487 U10.35
LED1: R7.1 U10.36 | length 4203
  Top Layer w6: v1@470,-390 510,-430 575,-430 651,-506 U10.36 ; v1(1323,-2785) 1323,-2730.46 R7.1
  Bottom Layer w6: v1(468,-390) 445,-390 383,-452 383,-718 415,-750 415,-820.46 262.96,-972.5 176.1,-972.5 136.71,-1011.89 136.71,-1463.29 -60,-1660 -60,-2325 398.24,-2783.24 ccw(c402.49,-2779) 402.49,-2785 v1@1327.72,-2785
LRCLK: U4.23 U10.45 | length 2188
  Top Layer w6: v1@667.71,-690 673.71,-684 U10.45
  Top Layer w8: v1(665,-690) v1@667.71,-690 ; U4.23 2299.21,-155.79 v1@2325,-130
  Bottom Layer w8: v1(665,-690) 1066.87,-690 1384.39,-372.48 1384.39,-350.61 1700,-35 1970,-35 2015,-80 2284.13,-80 2287.13,-77 2312,-77 2330,-95 2330,-124.58 v1(2328.43,-126.16)
MCLK: U4.21 U10.51 | length 2012
  Top Layer w6: v1(855.46,-914.75) 860.57,-882.85 ccw(c842.8,-880) 860.79,-880.3 861.48,-846.14 ccw(c855.48,-846.02) U10.51@861.48,-846.03 ; U10.51@861.48,-846 U10.51 ; v1(1460,-460) 1461.25,-439.36 ccw(c1455.26,-439) 1461.26,-439 v1(1461.26,-385)
  Top Layer w8: U4.21 2309.84,-195.16 v1@2330,-175
  Bottom Layer w6: v1(855.46,-914.75) 1021.42,-758.63 cw(c1025.53,-763) 1025.44,-757 ; 1025.49,-757 1170.45,-757 ccw(c1170.45,-751) 1174.77,-755.17 v1(1460,-460) ; v1@1465,-380 1667.24,-177.76 cw(c1671.49,-182) 1671.49,-176 v1(2330,-176)
MISO: P6.7 U10.52 | length 1892.4
  Top Layer w6: P6.7 828.19,-2306.81 881,-2254 U10.52
MOSI: P6.3 U10.59 | length 1877.8
  Top Layer w6: P6.3 1001.42,-2438.58 1019,-2421 U10.59
Net*1_1: *1.1 U10.20 | length 150.2
  Top Layer w6: *1.1 1046.46,-261.46 1059,-274 U10.20
Net*1_2: *1.2 U10.19 | length 155.6
  Top Layer w6: U10.19 1078,-312 1103.54,-286.46 *1.2
NetC2_1: C2.1 P1.2 | length 883.8
  Top Layer w8: C2.1 2115,-676.74 ccw(c2123,-676.69) 2117.31,-682.31 2364.97,-929.97 ; P1.2 2385,-1130 2395,-1120 2395,-963.31 ccw(c2387,-963.31) 2392.67,-957.67 2365,-930
NetC12_1: C12.1 U3.4 | length 79.6
  Top Layer w10: C12.1@1707.6,-216.81 U3.4
NetC18_1: C18.1 U5.4 | length 74.6
  Top Layer w8: U5.4 C18.1@2122.4,-1058.35
NetC19_1: C19.1 U4.10 | length 110.3
  Top Layer w8: C19.1 2045.59,-374.41 2090.79,-329.21 U4.10
NetC23_1: C23.1 U6.4 | length 64.8
  Top Layer w8: U6.4 C23.1@2542.4,-182.99
NetC24_1: C24.1 P11.2 | length 1441
  Top Layer w8: C24.1 2170,-685.55 2477.66,-993.21 cw(c2472,-998.87) 2480,-998.87 2480,-1536.69 cw(c2472,-1536.69) 2477.66,-1542.34 2347.33,-1672.67 cw(c2341.69,-1667) P11.2@2341.69,-1675
NetC28_1: C28.1 U8.4 | length 76.8
  Top Layer w6: C28.1 235.59,-2509.41 257.76,-2487.24 U8.4
NetC33_1: C33.1 U9.4 | length 88.2
  Top Layer w6: C33.1@289.21,-1870.34 291.61,-1867.94 U9.4
NetD1_A: D1.A R7.2 | length 79.1
  Top Layer w6: R7.2 D1.A
NetP5_2: P5.2 R3.1 | length 72.8
  Top Layer w8: P5.2 R3.1@2300,-2495
NetP7_2: P7.2 R5.1 | length 72.8
  Top Layer w8: P7.2 R5.1@1825,-2495
NetP9_2: P9.2 R6.1 | length 80.3
  Top Layer w8: R6.1@2745,-2500 2745,-2537.83 P9.2
NetR10_1: R10.1 U10.13 | length 227.1
  Top Layer w6: U10.13 1279,-506 1356.54,-428.46 R10.1@1356.54,-395
NetU10_32: U10.32 Y1.3 | length 242.6
  Top Layer w6: Y1.3 807.44,-242.44 822,-257 U10.32
NetU10_33: U10.33 Y1.1 | length 239.2
  Top Layer w6: Y1.1 631.54,-406.54 672,-447 U10.33
POW1: U8.3 U10.62 | length 2361.4
  Top Layer w6: v2@195,-2350 237.76,-2392.76 U8.3 ; U10.62 U10.62@1079.98,-845.77 ; v1(1080,-995) 1080,-846.23 ccw(c1074,-846.23) U10.62@1079.98,-845.8
  Top Layer w8: v2(185,-2345) 190,-2345 v2@195,-2350
  Bottom Layer w6: v2(185,-2345) -33.24,-2126.76 cw(c-29,-2122.51) -35,-2122.51 -35,-1727.34 cw(c-29,-1727.34) -32.93,-1722.8 498.75,-1262.94 cw(c765.47,-1572.72) 795,-1165 820.82,-1166.87 ccw(c821.23,-1160.88) 823.13,-1166.58 ccw(c821.23,-1160.88) 824.57,-1165.87 v1(1080,-995)
RESET: P14.1 U10.34 | length 599.5
  Top Layer w6: v1@672,-467 U10.34 ; P14.1 798,-148 v1(798,-220)
  Bottom Layer w6: v1(670,-470) 839.05,-470 ccw(c839,-464) 843.26,-468.22 ccw(c839,-464) 845,-464 cw(c851,-464) 845.04,-463.3 862.88,-311.88 ccw(c845,-309.77) 862.34,-304.96 859.84,-295.94 ccw(c854.06,-297.55) 858.32,-293.32 796.72,-231.72 cw(c801,-227.51) 795,-227.56 v1@795,-220
SCK: P6.5 U10.58 | length 1905.3
  Top Layer w6: P6.5@914.8,-2690 914.8,-2400.2 1000,-2315 U10.58
SCL: P8.3 R9.1 U2.16 U4.29 U10.37 | length 5705.4
  Top Layer w6: U2.16 v1(373,-755) v1(478,-755) 545,-755 655,-645 655,-547 676,-526 U10.37
  Top Layer w8: U4.29 2130.16,-54.84 v1@2150,-35
  Bottom Layer w6: 159.29,-1053.71 148.71,-1043.13 148.71,-1016.86 177.57,-988 327,-988 451.51,-863.49 451.51,-793.49 480,-765 v1@480,-755
  Bottom Layer w8: 159.29,-1053.71 165.87,-1060.29 765.64,-1060.29 849.93,-976 1277.69,-976 cw(c1277.69,-984) 1283.31,-978.31 1757.67,-1452.67 cw(c1752,-1458.31) P8.3@1760,-1458.27 ; v1@370,-755 370,-410 417.5,-362.5 417.5,-167.5 590,5 965,5 1210,-240 1430,-240 1737.66,67.66 2057.34,67.66 2150,-25 v1(2150,-36) ; P8.3 P8.3@1760,-1458.31
SDA: P8.4 R8.1 U2.15 U4.27 U10.38 | length 6092.2
  Top Layer w6: U2.15 290,-830 v1@295,-835 ; v1(298,-835) 358,-895 427.51,-895 ccw(c427.51,-889) 431.76,-893.24 670,-655 670,-557 681,-546 U10.38
  Top Layer w8: U4.27 2169.53,-50.47 v1@2185,-35
  Bottom Layer w6: v1@475,-856.97 331.97,-1000 182.54,-1000 160.71,-1021.83 160.71,-1036.74 171.26,-1047.29 760.26,-1047.29 857.54,-950 1119.68,-950
  Bottom Layer w8: v1@300,-830 300,-460.2 390,-370.2 390,-150 560,20 995,20 1240,-225 1406.31,-225 1455,-176.31 1455,-160 1700,85 2120,85 2190,15 v1(2190,-31) ; 1119.68,-950 1316.69,-950 cw(c1316.69,-958) 1322.34,-952.34 1840,-1470 P8.4
  other v1: 473,-850
SGTL_EN: U3.3 U6.3 U7.3 U10.61 | length 3470.9
  Top Layer w6: U10.61 1059,-1019 ccw(c1065,-1019) 1065,-1025 1502.51,-1025 ccw(c1502.51,-1019) 1506.76,-1023.24 1620,-910 v1(1620,-405)
  Top Layer w8: U6.3 2542.4,-389.7 2555,-402.29 v1(2555,-405)
  Top Layer w12: v1(1620,-405) 1620,-90 1667.24,-42.76 U3.3 ; U7.3 v1@2294.41,65.59
  Bottom Layer w12: v1(1620,-405) v1(2555,-405) 2545.6,-376.53 cw(c2557,-372.78) 2545,-372.83 2544.97,5.06 ccw(c2532.97,5.06) 2541.53,13.47 2541.49,13.51 2490,65 v1(2295,65)
SWCLK: P14.7 U10.22 | length 262.3
  Top Layer w6: P14.7 948,-148 v1(948,-220) ; U10.22 1020,-344 v1(1020,-285)
  Bottom Layer w6: v1(948,-220) 948,-229.16 ccw(c954,-229.16) 950.44,-233.99 957.77,-239.37 v1(1020,-285)
SWDIO: P14.9 U10.25 | length 259
  Top Layer w6: U10.25 960,-318.12 960,-287.49 cw(c966,-287.49) 961.76,-283.24 993.22,-251.78 ccw(c989,-247.51) 995,-247.55 P14.9@995,-125
UP-RX: P7.1 U10.29 | length 3834.4
  Top Layer w6: v1(513,-855) 740,-1082 v1@740,-1865 ; U10.29 881,-327.25 885,-323.25 v1(885,-320) ; v1(1390.86,-1869.03) 1391.88,-1889.71 cw(c1385.88,-1890) 1391.88,-1889.99 1392,-1955.2 1393,-2607.54 ccw(c1411,-2607.51) 1393,-2607.6 1393.23,-2655.77 ccw(c1399.23,-2655.75) 1394.97,-2659.97 1408.28,-2673.28 ccw(c1412.49,-2669) 1412.44,-2675 1814,-2675 cw(c1814,-2681) 1820,-2680.97 P7.1@1820,-2751.41
  Bottom Layer w6: v1@515,-855 511.04,-851.04 511.04,-775 652.58,-633.46 652.58,-632.42 722.5,-562.5 787.5,-562.5 885,-465 v1(885,-320) ; v1(738,-1865) v1(1390.86,-1869.03)
V_BATT: P2.2 P4.2 | length 1680.5
  Bottom Layer w20: P4.2 35,-1915 35,-1910 380,-1565 1215,-1565 1330,-1450 P2.2@1330,-1265
VA: C9.2 C10.1 C13.1 U3.5 U4.5 | length 335.2
  Top Layer w8: C13.1@1950.43,-214.84 U4.5
  Top Layer w10: C10.1@1782.4,-216.81 U3.5 ; C10.1 C9.2@1859.09,-219.41 ; C9.2 C13.1@1950.43,-218.5
VBUS: D3.A P13.1 | length 1228.6
  Top Layer w6: D3.A 580,-30 610,0 650,0 738.24,88.24 cw(c742.49,84) 742.49,90 1047.51,90 cw(c1047.51,84) 1051.73,88.27 1103.26,36.74 cw(c1099,32.51) 1105,32.51 1105,-65 1160,-65 1180,-45 1220,-45 1227.91,-52.91 1344.4,-52.91 1347.91,-56.43 P13.1
VCC: C30.2 C32.1 P8.1 P14.10 R8.2 R9.2 R10.2 U2.2 U9.5 U10.3 U10.7 U10.14 U10.21 U10.30 U10.48 | length 1042.3
  Top Layer w6: U2.2 v1(290,-330) ; v1(320,-960) 361.54,-960 R8.2 ; v1(358.62,-2010.34) 290.12,-2010.34 289.21,-2009.43 289.21,-1945.34 291.81,-1942.74 U9.5 ; v1(385,-825) 423.46,-825 R9.2 ; v1(720,-815) 700,-795 700,-750 707,-743 U10.48 ; U10.30 863,-344 v1(863,-240) ; P14.10 995,20.31 1006.96,32.27 1032.27,32.27 v1(1045,45) ; U10.21 1039.5,-369.5 1039.5,-325.5 v1(1040,-325) ; U10.3 1248,-703 v1@1320,-775 ; U10.7 v1(1255,-625) ; U10.14 1239.75,-487 1246.75,-480 v1(1250,-480) ; R10.2@1355,-315 1359.34,-301 ; 1359.35,-300.97 ccw(c1353.61,-299.22) 1359.61,-299.34 v1(1360,-280)
  other v1: 1321.3,-773.7
VCC1: C3.2 C4.1 P6.4 R4.1 U8.5 | length 1945.5
  Top Layer w6: 660,-2795 660,-2054.02 cw(c666,-2054.02) 661.76,-2049.78 737.88,-1973.65 737.88,-1971.69 754.57,-1955 R4.1
  Top Layer w8: U8.5 487.24,-2487.24 487.69,-2487.66 490.41,-2490.15 490.89,-2490.59 C4.1 C4.1@485,-2490.59
  Top Layer w20: C3.2 425,-2775 ccw(c445,-2775) 445,-2795 660,-2795 945,-2795 952.25,-2787.75 ccw(c938.11,-2773.61) 958.11,-2773.61 P6.4
VDDD: C8.1 C26.1 U4.30 U7.5 | length 177.2
  Top Layer w8: U4.30 C8.1@2110.47,-39.88
  Top Layer w10: C8.1 C26.1 ; C26.1@2106.18,14.41 U7.5
VDDIO: C17.1 C20.2 C21.1 U4.20 U6.5 | length 348.2
  Top Layer w8: U4.20 2295.43,-214.84 C17.1 2365.59,-229.41 2390,-205 2390,-181.5 C20.2 2465.91,-171.5 2467.6,-173.19 U6.5
VH: C14.2 C15.1 P1.1 P11.1 U5.5 | length 1352.5
  Top Layer w6: 2185,-955 2260,-1030 ; P11.1 2273.51,-1575 2270,-1571.49 2270,-1040 2260,-1030 ; P1.1 2260,-1030
  Top Layer w8: C14.2 1921.34,-1056.66 1916.66,-1051.97 1916.66,-962.96 cw(c1924.66,-963) 1924.62,-955 2185,-955 ; U5.5 C15.1@2047.6,-1058.35
  Top Layer w12: C14.2@1980,-1058.35 C15.1@2047.6,-1058.35
VIN: C6.2 C7.1 C11.1 C16.1 C22.1 C25.1 C27.1 C31.1 D3.K P4.3 R1.2 U3.1 U5.1 U6.1 U7.1 U8.1 U9.1 U9.3 | length 13437.3
  Top Layer w6: U9.3@482.32,-1865.34 473.46,-1865.34 U9.3 470.86,-1844.14 505,-1810 579.41,-1810 ; C31.1@541.81,-1942.74 C31.1@543.62,-1940.93
  Top Layer w8: -55,-1095 6.54,-1095 R1.2 ; C11.1 1790.59,67.32 cw(c1798.59,67.28) 1792.9,72.9 1809.41,89.41 2319.41,89.41 ; v1@2045,-1370 2049.41,-1365.59 C16.1 ; 2319.41,85.59 2604.41,85.59 ; 2459.1,-454.41 2454.41,-449.72 C22.1 2467.6,-391.81 U6.1 ; 2865,-175 2872.5,-182.5
  Top Layer w12: C7.1@17.69,-2229.99 17.69,-2222.22 C7.1 ; U3.1 C11.1@1782.4,31.81 ; C16.1@2047.6,-1297.17 U5.1 ; U7.1 C25.1@2323.82,14.41 ; C25.1 2319.41,85.59 ; 2459.1,-454.41 2585.59,-454.41 2865,-175
  Top Layer w15: U9.1 C31.1@541.81,-1942.74
  Top Layer w20: D3.K 100,-30 -55,-185 -55,-1095 -55,-1932.28 ccw(c-35,-1932.28) -49.17,-1946.39 -10.54,-1985.03 19.43,-2015 P4.3 ; U8.1 352.4,-2323.78 C27.1 350.59,-2180.59 325,-2155 30,-2155 ; U9.1 470.86,-1999.14 405,-2065 80,-2065 P4.3 ; C31.1 579.41,-1940.59 579.41,-1810 ; 2604.41,85.59 2865,-175 ; 2872.5,-182.5 3034.14,-344.14 3034.2,-344.2 cw(c3019.94,-358.23) 3039.94,-358.23 v1(3040,-1375) 3040,-2815 cw(c3020,-2815) 3020.06,-2835 288.28,-2835 cw(c288.28,-2815) 274.18,-2829.18 274.14,-2829.14 30,-2585 30,-2305 30,-2230 30,-2155 ; 30,-2155 P4.3
  Bottom Layer w12: v1@2050,-1365 3025.03,-1365 cw(c3025.03,-1377) 3033.51,-1368.51 v1(3040,-1375)
  other v1: 2048,-1365
VREF_OUT: U10.17 | length 128.8
  Top Layer w6: U10.17 1118,-310.51 1121.51,-307 v3@1183,-307
  Top Layer w8: v3@1183,-307 v3(1185,-305)
VSENS: R1.1 R2.2 U10.63 | length 1263.2
  Top Layer w6: U10.63 1098,-868 v1@1145,-915
  Top Layer w10: R1.1 R2.2 149.71,-1031.54 151.96,-1029.29 v1(178.71,-1029.29)
  Bottom Layer w6: v1(178.71,-1029.29) 178.71,-1029.8 178.8,-1029.89 196.96,-1027.28 ccw(c196.11,-1021.34) 197.05,-1027.27 198.49,-1027.04 ccw(c197.55,-1021.12) 199,-1026.94 203.37,-1022.57 229.43,-1022.57 ccw(c229.43,-1016.57) 230.28,-1022.51 303.2,-1012.06 cw(c304.05,-1018) 304.05,-1012 336.94,-1012 341.1,-1007.84 cw(c345.34,-1012.08) 344.49,-1006.14 858.01,-932.56 ccw(c855.46,-914.75) 867.23,-928.36 873.1,-923.28 cw(c884.89,-936.89) 884.42,-918.89 1032.38,-915 cw(c1032.53,-921) 1032.44,-915 ; 1032.49,-915 v1(1143,-915)
pads on no net: P4.1 P5.3 P5.4 P6.0 P6.1 P6.8 P7.3 P7.4 P9.3 P9.4 P13. P13.4 P14.2 P14.3 P14.4 P14.5 U2.1 U2.4 U2.5 U2.6 U2.7 U2.8 U2.9 U2.10 U2.11 U2.12 U4.2 U4.4 U4.6 U4.8 U4.9 U4.11 U4.12 U4.16 U4.17 U4.18 U4.19 U4.22 U4.28 U7.4 U10.1 U10.2 U10.8 U10.9 U10.10 U10.11 U10.12 U10.18 U10.23 U10.24 U10.26 U10.27 U10.39 U10.40 U10.41 U10.42 U10.43 U10.53 U10.54 U10.55 U10.56 U10.64
copper on no net: | length 90
  Top Layer w12: 1460,-650 1550,-650

## Polygon pours and split planes (outlines as drawn)
DGND on Internal Plane 1 (split plane): 1509.9,-1275 1510.29,-1276.95 1511.4,-1278.6 1646.4,-1413.6 1648.05,-1414.71 1650,-1415.1 1952.89,-1415.1 2057.4,-1519.61 2057.4,-1822.5 2057.79,-1824.45 2058.9,-1826.1 2241.4,-2008.6 2243.05,-2009.71 2245,-2010.1 3423.49,-2010.1 3423.49,-2857.86 -86.32,-2857.86 -86.32,101.95 1509.9,101.95
AGND on Internal Plane 1 (split plane): 3423.49,-1999.9 2247.11,-1999.9 2067.6,-1820.39 2067.6,-1517.5 2067.21,-1515.55 2066.1,-1513.9 1958.6,-1406.4 1956.95,-1405.29 1955,-1404.9 1652.11,-1404.9 1520.1,-1272.89 1520.1,101.95 3423.49,101.95
VCC on Internal Plane 2 (split plane): 1509.9,-1275 1510.29,-1276.95 1511.4,-1278.6 1646.4,-1413.6 1648.05,-1414.71 1650,-1415.1 1952.89,-1415.1 2057.4,-1519.61 2057.4,-1822.5 2057.79,-1824.45 2058.9,-1826.1 2241.4,-2008.6 2243.05,-2009.71 2245,-2010.1 3423.49,-2010.1 3423.49,-2857.86 -86.32,-2857.86 -86.32,101.95 1509.9,101.95
no net on Internal Plane 2 (split plane): 3423.49,-1999.9 2247.11,-1999.9 2067.6,-1820.39 2067.6,-1517.5 2067.21,-1515.55 2066.1,-1513.9 1958.6,-1406.4 1956.95,-1405.29 1955,-1404.9 1652.11,-1404.9 1520.1,-1272.89 1520.1,101.95 3423.49,101.95

## Other copper
Internal Plane 1 (plane layer: these items are gaps in the copper):
  lines w10: 1515,110 1515,-1275 1650,-1410 1955,-1410 2062.5,-1517.5 2062.5,-1822.5 2245,-2005 3445,-2005
Internal Plane 2 (plane layer: these items are gaps in the copper):
  lines w10: 1515,115 1515,-1275 1650,-1410 1955,-1410 2062.5,-1517.5 2062.5,-1822.5 2245,-2005 3440,-2005

## Silkscreen, mask and mechanical layers (free items; w line width, h text height)
Top Overlay:
  circle w20: c415,-445 r11.18
  circle w10: c1225,-780 r5
  lines w10: 155,-85 155,25 ; 575,-330 575,-210 750,-210 750,-330 575,-330
  text "V" at 1069.94,20 h60 r180
  text "RST" at 759.45,-130 h50 r90
  text "K" at 230,-145 h60
  text "DIO" at 1064.45,-160 h50 r90
  text "1" at 2995,-1020 h80 r90
  text "+" at 2190,-1060 h80
  text "3" at 2994.14,-1122.46 h80 r90
  text "S" at 2235,-1152.46 h80 r90
  text "-" at 1500,-1180 h60 r90
  text "2" at 2995,-1225 h80 r90
  text "RIGHT" at 3095,-1240 h60 r90
  text "-" at 2230,-1245 h80 r90
  text "+" at 1450,-1295 h60
  text "1" at 2995,-1585 h80 r90
  text "+" at 2195,-1605 h80
  text "3" at 2994.14,-1687.46 h80 r90
  text "S" at 2240,-1697.46 h80 r90
  text "OFF" at 110,-1760 h120
  text "LEFT" at 3095,-1785 h60 r90
  text "-" at 2235,-1790 h80 r90
  text "2" at 2995,-1790 h80 r90
  text "ON" at 105,-2150 h120
  text "LS1/LS2" at 3245,-2610 h150 r90
  text "Loggerhead v4.0" at 3355,-2620 h100 r90
  text "UP" at 1580,-2870 h120
  text "DOWN" at 1970,-2870 h120
  text "ENTER" at 2440,-2870 h120
Bottom Overlay:
  text "-" at 1150,-1550 h100
  text "+" at -10,-1555 h100
Mechanical 1:
  the board outline again, w10

## Text inside footprints (layer, text, board x,y; h text height)
C3: Top Overlay "+" at 440,-2530 h19.68 r270
C6: Top Overlay "+" at 15,-2340 h19.68 r180
C9: Top Overlay "+" at 1840,-185 h19.68 r90
C14: Top Overlay "+" at 1990,-1090 h19.68 r270
C20: Top Overlay "+" at 2415,-200 h19.68 r270
C30: Top Overlay "+" at 320,-1990 h19.68